# Altium PCB BCM_ECU_revA_V3.PcbDoc (part 4 of 7)
Units mm, origin at the board's own origin, x right, y up, seen from the top; angles counter-clockwise.
Board outline 109.5 x 156 mm, 4 copper layers (TOP SIG, GND, PWR, BOT SIG), stack 0.603 mm thick; 580 components, 446 nets, 1965 pads, 870 vias.
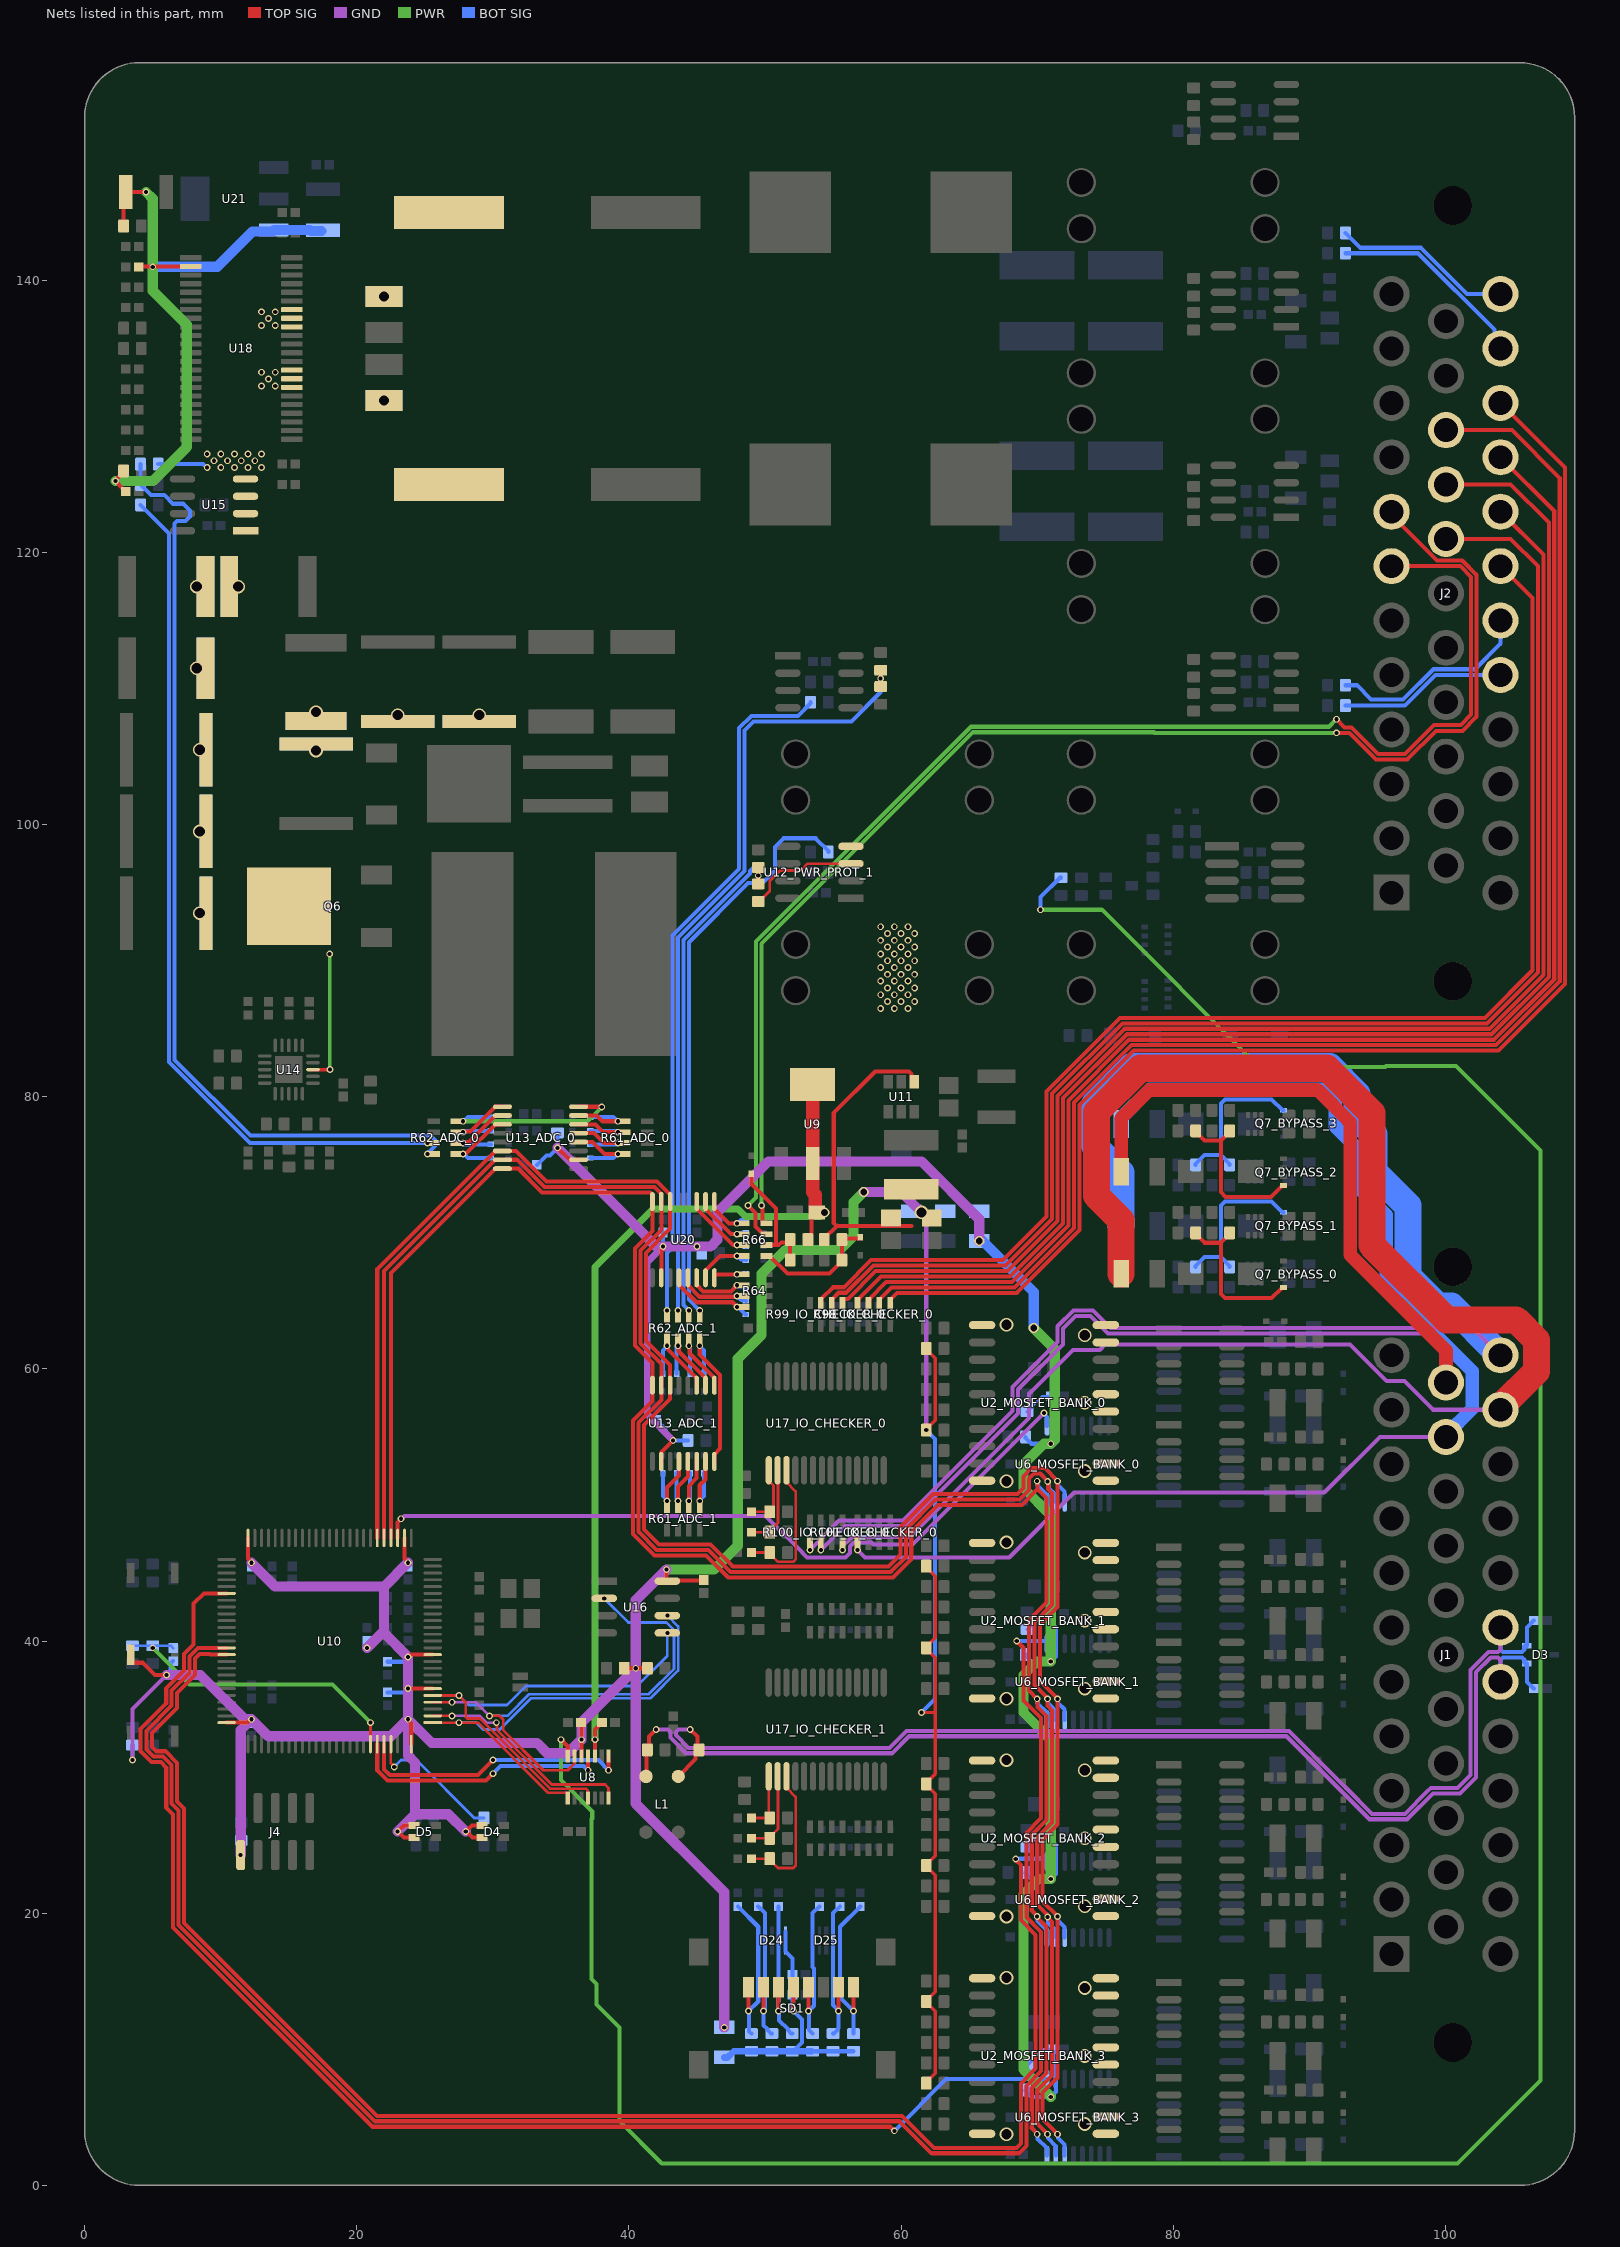
[diagram p5: the nets of this part, all layers, seen from the top]

## Via types
v1: diameter 0.5, hole 0.3, TOP SIG to BOT SIG, tented both sides, 797 vias
v2: diameter 1, hole 0.75, TOP SIG to BOT SIG, tented both sides, 56 vias
v3: diameter 4, hole 2.5, TOP SIG to BOT SIG, 9 vias
v4: diameter 0.75, hole 0.5, TOP SIG to BOT SIG, tented both sides, 6 vias
v5: diameter 2, hole 1.75, TOP SIG to BOT SIG, tented both sides, 2 vias

## Nets (pads, with @x,y where several pads share a name; then routed paths per layer and width w, separated by ;. In a path a pad name is that pad's centre, name@x,y a point inside that pad or via, vN(x,y) a via of type N, cw(c..) or ccw(c..) an arc to the next point about the centre after c; other vN are vias at no path point)
3V3: C10.1 C22.2 C24.1 C25.1 C26.1 C27.1 C28.1 C29.1 C36.1 C37.1 C77.1 C119.2 C120.2 D4.2 D4.3 D5.2 D5.3 F7.1 F8.1 F9.1 F11.1 F13.1 FB1.1 J4.1 L5.2 R7_MOSFET_BANK_0.2 R7_MOSFET_BANK_1.2 R7_MOSFET_BANK_2.2 R7_MOSFET_BANK_3.2 R8_MOSFET_BANK_0.2 R8_MOSFET_BANK_1.2 R8_MOSFET_BANK_2.2 R8_MOSFET_BANK_3.2 R36.2 R38.2 R42.1 R48.1 R53.2 SW2.2 U8.5 U10.6 U10.11 U10.27 U10.50 U10.75 U10.100 U11.1 U16.8 | length 321.7
  TOP SIG w0.102: v2(61.5,71.5) 61.924,71.076 C119.2@62.25,71.076
  TOP SIG w0.25: v1(61.5,34.75) 62.5,34.75 ; R8_MOSFET_BANK_3.2@61.85,7.5 61.85,7.575 62.5,8.225 62.5,12.775 61.85,13.425 R7_MOSFET_BANK_3.2@61.85,13.5 61.85,13.575 62.5,14.225 62.5,22.775 61.85,23.425 R8_MOSFET_BANK_2.2@61.85,23.5 61.85,23.575 62.5,24.225 62.5,28.775 61.85,29.425 R7_MOSFET_BANK_2.2@61.85,29.5 61.85,29.575 62.5,30.225 62.5,34.75 ; R8_MOSFET_BANK_1.2@61.85,39.5 61.85,39.425 62.5,38.775 62.5,34.75 ; R8_MOSFET_BANK_1.2@61.85,39.575 62.5,40.225 62.5,44.775 61.85,45.425 R7_MOSFET_BANK_1.2@61.85,45.5 ; R8_MOSFET_BANK_0.2@61.85,55.575 62.5,56.225 62.5,60.775 61.85,61.425 R7_MOSFET_BANK_0.2@61.85,61.5
  TOP SIG w0.3: SW2.2@3.375,39 3.375,38.525 3.5,38.4 4.273,38.4 5.173,37.5 v1(6,37.5) ; U10.75@10.425,34 11.946,34 12.196,34.25 v1(12.25,34.25) ; U10.50@12,47.575 12,46.054 12.25,45.804 v1(12.25,45.75) ; U10.27@23.5,47.575 23.5,46.054 23.75,45.804 v1(23.75,45.75) ; v1(23.75,34.25) 23.75,34.196 24,33.946 U10.100@24,32.425 ; v1(23.75,36.5) U10.6@25.576,36.5 ; v1(23.75,38.836) 23.804,38.836 23.968,39 U10.11@25.576,39 ; D5.3@24.2,25.55 23.45,25.55 v1(23,26) 23.45,26.45 D5.2@24.2,26.45 ; D4.3@29.2,25.55 28.504,25.55 28.054,26 v1(28,26) 28.45,26.45 D4.2@29.2,26.45 ; C10.1@36.479,34 36.497,33.981 36.497,31.545 U8.5@36.5,31.543 ; R53.2@39.65,38 v1(40.5,38) R36.2@41.25,38 ; v1(42.75,45.25) 42.75,44.471 U16.8@42.816,44.405 42.853,44.442 45.463,44.442 C77.1@45.5,44.479 ; R48.1@54.35,69.5 54.35,69.575 55.275,70.5 ; 60.75,70.5 55.275,70.5 ; U11.1@60.95,81.099 60.75,81.3 60.75,81.675 60.574,81.851 58.101,81.851 55.048,78.798 55.048,70.727 55.275,70.5
  GND w0.3: v1(3.5,31.25) 3.5,35 v1(6,37.5) ; v2(61.5,71.5) 61.5,71.311 61.85,70.961 v1(61.85,55.5)
  GND w0.75: v1(6,37.5) 8.5,37.5 11.75,34.25 v1(12.25,34.25) ; v1(11.46,24.27) 11.46,33.46 v1(12.25,34.25) ; v1(12.25,45.75) 14,44 22,44 ; v1(20.75,39.5) 22,40.75 ; v1(23,26) 24.275,27.275 ; v1(23.75,45.75) 22,44 ; v1(28,26) 26.725,27.275 24.275,27.275 ; v1(42.75,45.25) 40.5,43 v1(40.5,38) ; v1(47,11.6) 47,21.55 40.5,28.05 v1(40.5,38) ; v4(57.25,73) 60,73 v2(61.5,71.5) ; v1(12.25,34.25) 13.5,33 22.5,33 v1(23.75,34.25) ; 22,40.75 22,44 ; 22,40.75 22,40.586 v1(23.75,38.836) v1(23.75,36.5) v1(23.75,34.25) ; v1(23.75,34.25) 25.5,32.5 33.25,32.5 34,31.75 35.5,31.75 v1(36.5,32.75) 36.5,34 v1(40.5,38) ; v1(23.75,34.25) 23.75,31.596 24.275,31.071 24.275,27.275
  PWR w0.75: v1(42.75,45.25) 46.25,45.25 48,47 48,60.75 49.75,62.5 49.75,67 51.5,68.75 55.5,68.75 56.5,69.75 56.5,72.25 v4(57.25,73)
  BOT SIG w0.3: v1(3.5,31.25) R42.1@3.5,32.35 ; v1(6,37.5) 6,37.554 6.314,37.868 6.314,38.335 C22.2@6.5,38.521 ; v1(11.46,24.27) 11.48,24.29 11.48,25.33 R38.2@11.5,25.35 ; C36.1@22.25,36.229 C37.1@23.75,36.229 ; C24.1@22.25,38.479 C25.1@23.75,38.479 ; v1(61.5,34.75) 62.5,35.75 62.5,54.85 v1(61.85,55.5)
3V3_V_SENSE: D46.1 R48.2 R51.1 R66.1 | length 9.5
  TOP SIG w0.3: R66.1@50.1,68.3 50.338,68.3 51.638,67 54.725,67 55.65,67.925 R51.1@55.65,68 R48.2@55.65,69.5 55.73,69.58 56.95,69.58 57,69.63 D46.1@57,69.66
5V: C9.1 C15.1 R125.1 U8.3 U9.2 U9.4 | length 68.4
  TOP SIG w0.3: U8.3@37.5,31.543 37.5,33.5 38,34 C9.1@38.021,34 ; R125.1@53.15,69.5 53.4,69.75 53.4,71.144 53.756,71.5 C15.1@53.802,71.5
  TOP SIG w1: U9.4@53.5,80.9 53.5,73 53.698,72.802 53.698,71.506 53.704,71.5 C15.1@53.802,71.5
  PWR w0.5: v1(37.5,32.75) 37.5,67.5 41.75,71.75 48,71.75 48.55,71.2 54.065,71.2 v4(54.365,71.5) v4@54.5,71.5
5V_V_SENSE: D47.1 R66.2 R125.2 R126.1 | length 9.3
  TOP SIG w0.3: D47.1@49,74.34 49,73.6 50.802,71.798 50.802,69.237 50.665,69.1 ; R66.2@50.1,69.1 R66.2@50.163,69.163 ; R66.2@50.33,69.1 50.665,69.1 ; R126.1@51.85,68 R125.2@51.85,69.5 51.649,69.299 51.199,69.299 51,69.1 50.802,69.1 50.665,69.1
A0_IO_CHECKER_0: R95_IO_CHECKER_0.1 R102_IO_CHECKER_0.2 U17_IO_CHECKER_0.15 | length 4.7
  TOP SIG w0.2: R102_IO_CHECKER_0.2@49,49.5 50.275,49.5 R95_IO_CHECKER_0.1@50.35,49.5 50.625,49.775 50.625,51.422 50.275,51.772 U17_IO_CHECKER_0.15@50.275,52.55
A0_IO_CHECKER_1: R95_IO_CHECKER_1.1 R102_IO_CHECKER_1.2 U17_IO_CHECKER_1.15 | length 4.4
  TOP SIG w0.2: R102_IO_CHECKER_1.2@49,27 R95_IO_CHECKER_1.1@50.35,27 50.275,27.075 U17_IO_CHECKER_1.15@50.275,30.05
A1_IO_CHECKER_0: R96_IO_CHECKER_0.1 R103_IO_CHECKER_0.2 U17_IO_CHECKER_0.16 | length 6.2
  TOP SIG w0.2: R103_IO_CHECKER_0.2@49,48 R96_IO_CHECKER_0.1@50.35,48 50.35,48.075 50.952,48.677 50.952,52.523 U17_IO_CHECKER_0.16@50.925,52.55
A1_IO_CHECKER_1: R96_IO_CHECKER_1.1 R103_IO_CHECKER_1.2 U17_IO_CHECKER_1.16 | length 6.2
  TOP SIG w0.2: R103_IO_CHECKER_1.2@49,25.5 R96_IO_CHECKER_1.1@50.35,25.5 50.35,25.575 50.952,26.177 50.952,30.024 U17_IO_CHECKER_1.16@50.925,30.05
A2_IO_CHECKER_0: R97_IO_CHECKER_0.1 R104_IO_CHECKER_0.2 U17_IO_CHECKER_0.17 | length 10.5
  TOP SIG w0.2: R104_IO_CHECKER_0.2@49,46.5 R97_IO_CHECKER_0.1@50.35,46.5 50.35,46.425 50.952,45.823 52.075,45.823 52.252,46 52.252,50.998 51.575,51.675 U17_IO_CHECKER_0.17@51.575,52.55
A2_IO_CHECKER_1: R97_IO_CHECKER_1.1 R104_IO_CHECKER_1.2 U17_IO_CHECKER_1.17 | length 10.5
  TOP SIG w0.2: R104_IO_CHECKER_1.2@49,24 R97_IO_CHECKER_1.1@50.35,24 50.35,23.925 50.952,23.324 52.075,23.324 52.252,23.5 52.252,28.549 51.575,29.225 U17_IO_CHECKER_1.17@51.575,30.05
ADC_3V3: C5_MOSFET_BANK_0.1 C5_MOSFET_BANK_1.1 C5_MOSFET_BANK_2.1 C5_MOSFET_BANK_3.1 C49_ADC_0.1 C49_ADC_1.1 C114.1 F13.2 R12_MOSFET_BANK_0.1 R12_MOSFET_BANK_1.1 R12_MOSFET_BANK_2.1 R12_MOSFET_BANK_3.1 R16_MOSFET_BANK_0.1 R16_MOSFET_BANK_1.1 R16_MOSFET_BANK_2.1 R16_MOSFET_BANK_3.1 R60_ADC_0.1 R60_ADC_1.1 R65.1 U6_MOSFET_BANK_0.2 U6_MOSFET_BANK_1.2 U6_MOSFET_BANK_2.2 U6_MOSFET_BANK_3.2 U13_ADC_0.2 U13_ADC_1.2 U20.2 | length 174.2
  TOP SIG w0.3: v1(34.75,76.25) 35.615,75.385 36.29,75.385 U13_ADC_0.2@36.3,75.375 ; U13_ADC_1.2@42.375,53.2 42.385,53.21 42.385,53.885 v1(43.25,54.75) ; U20.2@42.375,67.2 42.375,68.821 42.5,68.946 v1(42.5,69)
  GND w0.5: v1(42.5,69) 41.35,67.85 41.35,56.65 v1(43.25,54.75)
  GND w0.75: v1(34.75,76.25) 42,69 v1(42.5,69) v1(45,69) 46,69 46.5,69.5 46.5,71.5 50.25,75.25 61.5,75.25 65.75,71 v4(65.75,69.4)
  PWR w0.75: v4(69.75,63) 71.3,61.45 71.3,54.8 v1(71,54.5) 70.5,54.5 69,53 69,51.25 71,49.25 v1(71,38.5) 70,38.5 69,37.5 69,34.75 71,32.75 v1(71,22.5) 70.1,22.5 69,21.4 69,8.5 v1(71,6.5)
  BOT SIG w0.2: R12_MOSFET_BANK_3.1@69.25,8.85 69.325,8.85 69.625,9.15 69.625,9.225 70.4,10 C5_MOSFET_BANK_3.1@71.021,10 ; R12_MOSFET_BANK_2.1@69.25,24.85 69.325,24.85 69.625,25.15 69.625,25.225 70.4,26 C5_MOSFET_BANK_2.1@71.021,26 ; R12_MOSFET_BANK_1.1@69.25,40.85 69.325,40.85 69.625,41.15 69.625,41.225 70.4,42 C5_MOSFET_BANK_1.1@71.021,42 ; R12_MOSFET_BANK_0.1@69.25,56.85 69.325,56.85 69.625,57.15 69.625,57.225 70.4,58 C5_MOSFET_BANK_0.1@71.021,58
  BOT SIG w0.3: C49_ADC_0.1@33.229,75 33.25,75 33.935,75.685 34.185,75.685 v1(34.75,76.25) R60_ADC_0.1@34.75,77.35 ; C49_ADC_1.1@42,56.271 42,56.25 42.685,55.565 42.685,55.315 v1(43.25,54.75) R60_ADC_1.1@44.35,54.75 ; v1(42.5,69) C114.1@42.5,70.021 ; R16_MOSFET_BANK_3.1@69.15,7 69.15,6.925 69.575,6.5 v1(71,6.5) 71.375,6.875 U6_MOSFET_BANK_3.2@71.375,7.8 71.375,9.008 71.169,9.214 71.169,9.852 C5_MOSFET_BANK_3.1@71.021,10 ; R16_MOSFET_BANK_2.1@69.15,23 69.15,22.925 69.575,22.5 v1(71,22.5) 71.375,22.875 U6_MOSFET_BANK_2.2@71.375,23.8 71.375,25.008 71.169,25.214 71.169,25.852 C5_MOSFET_BANK_2.1@71.021,26 ; R16_MOSFET_BANK_1.1@69.15,39 69.15,38.925 69.575,38.5 v1(71,38.5) 71.375,38.875 U6_MOSFET_BANK_1.2@71.375,39.8 71.375,41.008 71.169,41.214 71.169,41.852 C5_MOSFET_BANK_1.1@71.021,42 ; R16_MOSFET_BANK_0.1@69.15,55 69.15,54.925 69.575,54.5 v1(71,54.5) 71.375,54.875 U6_MOSFET_BANK_0.2@71.375,55.8 71.375,57.008 71.169,57.214 71.169,57.852 C5_MOSFET_BANK_0.1@71.021,58
  BOT SIG w0.75: v4(65.75,69.4) 66,69.4 69.75,65.65 v4(69.75,63)
ADC_IN0: D36.1 R64.8 U20.4 | length 6.3
  TOP SIG w0.3: U20.4@43.675,66.7 43.675,66.175 44.95,64.9 47.6,64.9 v1(47.95,64.55)
  BOT SIG w0.3: v1(47.95,64.55) 48,64.55 48.55,64 D36.1@48.59,64
ADC_IN0_ADC_0: D29_ADC_0.1 R61_ADC_0.8 U13_ADC_0.4 | length 5.4
  TOP SIG w0.3: U13_ADC_0.4@36.3,76.675 37.325,76.675 38.2,75.8 v1(39.2,75.8)
  BOT SIG w0.3: D29_ADC_0.1@37.16,75.5 38.846,75.5 39.146,75.8 v1(39.2,75.8)
ADC_IN0_ADC_1: D29_ADC_1.1 R61_ADC_1.8 U13_ADC_1.4 | length 5.4
  TOP SIG w0.3: v1(42.8,50.3) 42.8,51.3 43.675,52.175 U13_ADC_1.4@43.675,53.2
  BOT SIG w0.3: D29_ADC_1.1@42.5,52.34 42.5,50.654 42.8,50.354 v1(42.8,50.3)
ADC_IN1: D35.1 R64.7 U20.5 | length 5.8
  TOP SIG w0.3: U20.5@44.325,66.7 44.325,66.175 45.198,65.302 48.352,65.302 R64.7@48.4,65.35
  BOT SIG w0.3: v1(47.95,65.35) 48.25,65.05 48.54,65.05 D35.1@48.59,65
ADC_IN1_ADC_0: D28_ADC_0.1 R61_ADC_0.7 U13_ADC_0.5 | length 5.3
  TOP SIG w0.3: U13_ADC_0.5@36.3,77.325 37.425,77.325 38.15,76.6 v1(39.2,76.6)
  BOT SIG w0.3: D28_ADC_0.1@37.16,76.5 39.046,76.5 39.146,76.6 v1(39.2,76.6)
ADC_IN1_ADC_1: D28_ADC_1.1 R61_ADC_1.7 U13_ADC_1.5 | length 5.3
  TOP SIG w0.3: v1(43.6,50.3) 43.6,51.35 44.325,52.075 U13_ADC_1.5@44.325,53.2
  BOT SIG w0.3: D28_ADC_1.1@43.5,52.34 43.5,50.454 43.6,50.354 v1(43.6,50.3)
ADC_IN2: D34.1 R64.6 U20.6 | length 4.9
  TOP SIG w0.3: U20.6@44.975,66.7 44.991,66.684 44.991,66.159 45.447,65.703 47.503,65.703 v1(47.95,66.15) ; R64.6@48.1,66.087 48.337,66.087 R64.6@48.4,66.15
  BOT SIG w0.3: v1(47.95,66.15) 48.004,66.15 48.104,66.05 48.54,66.05 D34.1@48.59,66
ADC_IN2_ADC_0: D27_ADC_0.1 R61_ADC_0.6 U13_ADC_0.6 | length 5.2
  TOP SIG w0.3: U13_ADC_0.6@36.3,77.975 37.525,77.975 38.1,77.4 v1(39.2,77.4)
  BOT SIG w0.3: D27_ADC_0.1@37.16,77.5 39.046,77.5 39.146,77.4 v1(39.2,77.4)
ADC_IN2_ADC_1: D27_ADC_1.1 R61_ADC_1.6 U13_ADC_1.6 | length 5.2
  TOP SIG w0.3: v1(44.4,50.3) 44.4,51.4 44.975,51.975 U13_ADC_1.6@44.975,53.2
  BOT SIG w0.3: v1(44.4,50.3) 44.4,50.354 44.5,50.454 D27_ADC_1.1@44.5,52.34
ADC_IN3: D8.1 R64.5 U20.8 | length 3
  TOP SIG w0.3: U20.8@46.275,66.7 46.275,66.927 46.298,66.95 v1(47.95,66.95) R64.5@48.4,66.95
  BOT SIG w0.3: v1(47.95,66.95) 47.975,66.975 48.565,66.975 D8.1@48.59,67
ADC_IN3_ADC_0: D26_ADC_0.1 R61_ADC_0.5 U13_ADC_0.7 | length 5.2
  TOP SIG w0.3: U13_ADC_0.7@36.3,78.625 37.625,78.625 38.05,78.2 v1(39.2,78.2)
  BOT SIG w0.3: D26_ADC_0.1@37.16,78.5 38.846,78.5 39.146,78.2 v1(39.2,78.2)
ADC_IN3_ADC_1: D26_ADC_1.1 R61_ADC_1.5 U13_ADC_1.7 | length 5.2
  TOP SIG w0.3: v1(45.2,50.3) 45.2,51.45 45.625,51.875 U13_ADC_1.7@45.625,53.2
  BOT SIG w0.3: v1(45.2,50.3) 45.2,50.354 45.5,50.654 D26_ADC_1.1@45.5,52.34
ADC_IN4: D40.1 R66.8 U20.7 | length 4.5
  TOP SIG w0.3: U20.7@45.625,66.7 45.625,67.225 46.7,68.3 v1(47.95,68.3) R66.8@48.4,68.3
  BOT SIG w0.3: v1(47.95,68.3) 47.976,68.3 48.226,68.05 48.54,68.05 D40.1@48.59,68
ADC_IN4_ADC_0: D33_ADC_0.1 R62_ADC_0.8 U13_ADC_0.8 | length 14.5
  TOP SIG w0.3: U13_ADC_0.8@36.3,79.275 36.31,79.265 37.985,79.265 v1(38,79.25)
  PWR w0.3: v1(27.8,78.2) 36.95,78.2 v1(38,79.25)
  BOT SIG w0.3: v1(27.8,78.2) 27.854,78.2 28.154,78.5 D33_ADC_0.1@29.84,78.5
ADC_IN4_ADC_1: D33_ADC_1.1 R62_ADC_1.8 U13_ADC_1.8 | length 11.5
  TOP SIG w0.3: v1(45.2,61.7) 45.2,61.05 46.7,59.55 46.7,59.503 46.702,59.502 46.702,54.152 46.275,53.725 U13_ADC_1.8@46.275,53.2
  BOT SIG w0.3: v1(45.2,61.7) 45.2,61.646 45.5,61.346 D33_ADC_1.1@45.5,59.66
ADC_IN5: D39.1 R66.7 U20.11 | length 5.7
  TOP SIG w0.3: U20.11@44.975,72.3 44.991,72.284 44.991,71.759 47.636,69.114 48.386,69.114 R66.7@48.4,69.1
  BOT SIG w0.3: v1(47.95,69.1) 48.004,69.1 48.054,69.05 48.54,69.05 D39.1@48.59,69
ADC_IN5_ADC_0: D32_ADC_0.1 R62_ADC_0.7 U13_ADC_0.9 | length 5.8
  TOP SIG w0.3: v1(27.8,77.4) 27.85,77.45 28.35,77.45 30.175,79.275 U13_ADC_0.9@30.7,79.275
  BOT SIG w0.3: v1(27.8,77.4) 27.854,77.4 27.954,77.5 D32_ADC_0.1@29.84,77.5
ADC_IN5_ADC_1: D32_ADC_1.1 R62_ADC_1.7 U13_ADC_1.9 | length 5.8
  TOP SIG w0.3: v1(44.4,61.7) 44.45,61.65 44.45,61.15 46.275,59.325 U13_ADC_1.9@46.275,58.8
  BOT SIG w0.3: v1(44.4,61.7) 44.4,61.646 44.5,61.546 D32_ADC_1.1@44.5,59.66
ADC_IN6: D38.1 R66.6 U20.10 | length 4.8
  TOP SIG w0.3: U20.10@45.625,72.3 45.625,71.761 47.486,69.9 v1(47.95,69.9) R66.6@48.4,69.9
  BOT SIG w0.3: v1(47.95,69.9) 48.004,69.9 48.054,69.95 48.54,69.95 D38.1@48.59,70
ADC_IN6_ADC_0: D31_ADC_0.1 R62_ADC_0.6 U13_ADC_0.10 | length 5.8
  TOP SIG w0.3: v1(27.8,76.6) 27.857,76.657 28.207,76.657 30.175,78.625 U13_ADC_0.10@30.7,78.625
  BOT SIG w0.3: v1(27.8,76.6) 27.854,76.6 27.954,76.5 D31_ADC_0.1@29.84,76.5
ADC_IN6_ADC_1: D31_ADC_1.1 R62_ADC_1.6 U13_ADC_1.10 | length 5.8
  TOP SIG w0.3: v1(43.6,61.7) 43.657,61.643 43.657,61.293 45.625,59.325 U13_ADC_1.10@45.625,58.8
  BOT SIG w0.3: D31_ADC_1.1@43.5,59.66 43.5,61.546 43.6,61.646 v1(43.6,61.7)
ADC_IN7: D37.1 R66.5 U20.9 | length 3.9
  TOP SIG w0.3: U20.9@46.275,72.3 46.291,72.284 46.291,71.759 47.35,70.7 v1(47.95,70.7) R66.5@48.4,70.7
  BOT SIG w0.3: v1(47.95,70.7) 47.976,70.7 48.226,70.95 48.54,70.95 D37.1@48.59,71
ADC_IN7_ADC_0: D30_ADC_0.1 R62_ADC_0.5 U13_ADC_0.11 | length 6
  TOP SIG w0.3: v1(27.8,75.8) 27.857,75.857 28.057,75.857 30.175,77.975 U13_ADC_0.11@30.7,77.975
  BOT SIG w0.3: v1(27.8,75.8) 27.854,75.8 28.154,75.5 D30_ADC_0.1@29.84,75.5
ADC_IN7_ADC_1: D30_ADC_1.1 R62_ADC_1.5 U13_ADC_1.11 | length 6
  TOP SIG w0.3: v1(42.8,61.7) 42.857,61.643 42.857,61.443 44.975,59.325 U13_ADC_1.11@44.975,58.8
  BOT SIG w0.3: D30_ADC_1.1@42.5,59.66 42.5,61.346 42.8,61.646 v1(42.8,61.7)
ADC_MISO_MOSFET_BANK_0: U6_MOSFET_BANK_0.15 U6_MOSFET_BANK_1.15 U6_MOSFET_BANK_2.15 U6_MOSFET_BANK_3.15 U10.30 U13_ADC_0.15 U13_ADC_1.15 U20.15 | length 164.9
  TOP SIG w0.3: U10.30@22,47.575 22,67.2 30.159,75.359 30.684,75.359 U13_ADC_0.15@30.7,75.375 31.779,75.375 33.778,73.377 41.873,73.377 U20.15@42.365,72.885 ; U20.15@42.375,72.3 42.375,70.221 40.848,68.694 40.848,61.884 42.375,60.357 U13_ADC_1.15@42.375,58.8 42.375,57.721 40.698,56.044 40.698,48.034 42.034,46.698 45.834,46.698 47.462,45.07 59.238,45.07 60.347,46.179 60.347,48.215 62.53,50.398 68.707,50.398 69.402,51.093 69.402,51.929 69.772,52.3 70.228,52.3 70.775,51.753 v1(70.775,51.726) ; v1(70.75,3.75) 70.75,3.778 70.005,4.523 70.005,6.976 71.098,8.07 71.098,19.348 70.75,19.696 v1@70.75,19.726 ; v1@70.762,51.713 70.813,51.663 70.813,51.161 71.098,50.876 71.098,42.666 69.798,41.366 69.798,36.755 70.75,35.803 70.75,35.25 71.098,34.902 71.098,26.666 70.005,25.573 70.005,20.648 70.736,19.917 70.736,19.764 v1(70.775,19.726)
  BOT SIG w0.3: v1(70.75,3.75) 70.788,3.712 70.788,3.462 71.365,2.885 71.365,2.21 U6_MOSFET_BANK_3.15@71.375,2.2 ; v1(70.75,35.75) 70.788,35.712 70.788,35.462 71.365,34.885 71.365,34.21 U6_MOSFET_BANK_1.15@71.375,34.2 ; v1(70.775,19.726) 70.813,19.687 70.813,19.287 71.375,18.725 U6_MOSFET_BANK_2.15@71.375,18.2 ; v1(70.775,51.726) 70.813,51.687 70.813,51.287 71.375,50.725 U6_MOSFET_BANK_0.15@71.375,50.2
ADC_MOSI_MOSFET_BANK_0: U6_MOSFET_BANK_0.14 U6_MOSFET_BANK_1.14 U6_MOSFET_BANK_2.14 U6_MOSFET_BANK_3.14 U10.31 U13_ADC_0.14 U13_ADC_1.14 U20.14 | length 167.7
  TOP SIG w0.3: U10.31@21.5,47.575 21.5,67.35 30.175,76.025 U13_ADC_0.14@30.7,76.025 31.697,76.025 33.944,73.778 42.072,73.778 43.025,72.825 U20.14@43.025,72.3 43.025,70.303 41.25,68.528 41.25,62.05 43.025,60.275 U13_ADC_1.14@43.025,58.8 43.025,57.803 41.1,55.878 41.1,48.2 42.2,47.1 46,47.1 47.628,45.472 59.072,45.472 59.945,46.345 59.945,48.381 62.364,50.8 68.541,50.8 69,51.259 69,52.1 69.602,52.702 70.576,52.702 71.5,51.778 v1(71.5,51.75) 71.5,42.5 70.2,41.2 70.2,37.078 71.5,35.778 v1(71.5,35.75) 71.5,26.5 70.406,25.406 70.406,20.872 v1@71.5,19.778 ; v1(71.5,3.75) 71.5,3.778 70.406,4.872 70.406,6.81 71.5,7.903 v1(71.5,19.75)
  BOT SIG w0.3: v1(71.5,3.75) 71.538,3.712 71.538,3.462 72.015,2.985 72.015,2.21 U6_MOSFET_BANK_3.14@72.025,2.2 ; v1(71.5,19.75) 71.538,19.712 71.538,19.462 72.015,18.985 72.015,18.21 U6_MOSFET_BANK_2.14@72.025,18.2 ; v1(71.5,35.75) 71.538,35.712 71.538,35.462 72.015,34.985 72.015,34.21 U6_MOSFET_BANK_1.14@72.025,34.2 ; v1(71.5,51.75) 71.538,51.712 71.538,51.462 72.015,50.985 72.015,50.21 U6_MOSFET_BANK_0.14@72.025,50.2
ADC_nCS_MOSFET_BANK_0: U6_MOSFET_BANK_0.1 U10.28 | length 56
  TOP SIG w0.3: U10.28@23,47.575 23,48.703 23.239,48.942 v1(23.239,48.987)
  GND w0.3: v1(23.239,48.987) 23.293,48.987 23.506,49.2 50.05,49.2 52.75,46.5 52.75,46.472 53.072,46.15 55.928,46.15 56.25,46.472 56.25,46.95 56.539,47.239 57.839,47.239 57.976,47.102 60.852,47.102 v1(70.5,56.75)
  BOT SIG w0.3: v1(70.5,56.75) 70.5,56.696 70.715,56.48 70.715,55.81 U6_MOSFET_BANK_0.1@70.725,55.8
ADC_nCS_MOSFET_BANK_1: U6_MOSFET_BANK_1.1 U10.64 | length 136.5
  TOP SIG w0.3: U10.64@10.425,39.5 8.325,39.5 7.698,38.873 7.698,37.666 6.389,36.357 6.389,35.257 4.527,33.395 4.527,32.041 5.07,31.498 5.761,31.498 6.389,30.871 6.389,28.046 6.902,27.533 6.902,19.123 21.323,4.702 59.898,4.702 62.25,2.35 68.65,2.35 69.202,2.902 69.202,7.309 70.295,8.402 70.295,18.605 69.202,19.698 69.202,25.905 70.295,26.999 70.295,34.337 68.995,35.637 68.995,39.505 v1(68.5,40)
  BOT SIG w0.3: v1(68.5,40) 70.702,40 70.725,39.977 U6_MOSFET_BANK_1.1@70.725,39.8
ADC_nCS_MOSFET_BANK_2: U6_MOSFET_BANK_2.1 U10.65 | length 117.5
  TOP SIG w0.3: U10.65@10.425,39 9.235,39 9.185,39.05 8.45,39.05 8.1,38.7 8.1,37.5 6.79,36.19 6.79,35.09 4.928,33.228 4.928,32.208 5.236,31.9 5.927,31.9 6.79,31.037 6.79,28.212 7.303,27.7 7.303,19.289 21.489,5.103 60.065,5.103 62.416,2.752 68.484,2.752 68.8,3.068 68.8,7.475 69.894,8.569 69.894,18.406 68.8,19.5 68.8,23.551 68.427,23.925 v1(68.427,23.979)
  BOT SIG w0.3: v1(68.427,23.979) 68.448,24 70.702,24 70.725,23.977 U6_MOSFET_BANK_2.1@70.725,23.8
ADC_nCS_MOSFET_BANK_3: U6_MOSFET_BANK_3.1 U10.56 | length 101.5
  TOP SIG w0.3: U10.56@10.425,43.5 8.75,43.5 8,42.75 8,39.743 7.297,39.04 7.297,37.833 5.987,36.523 5.987,35.423 4.1,33.536 4.1,31.9 4.903,31.097 5.595,31.097 5.987,30.704 5.987,27.763 6.5,27.25 6.5,18.956 21.156,4.3 59.2,4.3 v1(59.5,4)
  BOT SIG w0.3: v1(59.5,4) 63.3,7.8 U6_MOSFET_BANK_3.1@70.725,7.8
ADC_SCLK_MOSFET_BANK_0: U6_MOSFET_BANK_0.16 U6_MOSFET_BANK_1.16 U6_MOSFET_BANK_2.16 U6_MOSFET_BANK_3.16 U10.29 U13_ADC_0.16 U13_ADC_1.16 U20.16 | length 162.5
  TOP SIG w0.3: U10.29@22.5,47.575 22.5,67.05 30.175,74.725 31.861,74.725 33.611,72.975 41.561,72.975 41.725,72.811 41.725,70.139 40.447,68.861 40.447,61.717 41.725,60.439 U13_ADC_1.16@41.725,58.8 41.725,57.639 40.297,56.211 40.297,47.867 41.867,46.297 45.667,46.297 47.296,44.669 59.404,44.669 60.748,46.013 60.748,48.048 62.697,49.997 68.873,49.997 70.038,51.162 ; v1(70,3.75) 70,3.804 69.603,4.201 69.603,7.142 70.697,8.236 70.697,18.999 70,19.696 70,19.804 69.603,20.201 69.603,25.739 70.697,26.833 70.697,34.503 70.038,35.162 70.038,35.712 69.397,36.353 69.397,41.533 70.697,42.833 70.697,50.503 70.038,51.162 ; v1(70,51.75) 70.038,51.712 70.038,51.162
  BOT SIG w0.3: v1(70,3.75) 70.038,3.712 70.038,3.412 70.725,2.725 U6_MOSFET_BANK_3.16@70.725,2.2 ; v1(70,19.75) 70.038,19.712 70.038,19.412 70.709,18.741 70.709,18.216 U6_MOSFET_BANK_2.16@70.725,18.2 ; v1(70,35.75) 70.038,35.712 70.038,35.412 70.709,34.741 70.709,34.216 U6_MOSFET_BANK_1.16@70.725,34.2 ; v1(70,51.75) 70.038,51.712 70.038,51.412 70.709,50.741 70.709,50.216 U6_MOSFET_BANK_0.16@70.725,50.2
ADDR_PWM_0: J2.28 R9.1 | length 12.3
  BOT SIG w0.3: R9.1@92.65,108.75 97.019,108.75 99.269,111 J2.28@104,111
ADDR_PWM_1: J2.29 R10.1 | length 15.2
  BOT SIG w0.3: R10.1@92.65,110.25 93.5,110.25 94.55,109.2 96.901,109.2 99.124,111.424 102.174,111.424 104.05,113.3 J2.29@104.05,115
ADDR_PWM_2: J2.34 R70.1 | length 14.9
  BOT SIG w0.3: R70.1@92.65,142 93.582,142 93.584,141.998 98.002,141.998 103.6,136.4 103.6,135.45 J2.34@104.05,135
ADDR_PWM_3: J2.35 R71.1 | length 13.3
  BOT SIG w0.3: R71.1@92.65,143.5 93.75,142.4 98.2,142.4 101.6,139 J2.35@104.05,139
AMP_12V: C96.1 C97.2 C101.2 C118.1 R134.1 R135.1 U18.2 U21.3 | length 49.7
  TOP SIG w0.3: v1(2.25,125.25) 2.814,124.686 C101.2@3,124.5 ; v1@2.25,125.272 2.288,125.31 2.288,125.363 2.85,125.925 R135.1@2.85,126 ; R134.1@2.85,144 2.85,146.35 C96.1@3,146.5 v1(4.5,146.5) ; C97.2@3.979,141 3.995,141.016 7.764,141.016 U18.2@7.78,141.033
  PWR w0.75: v1(2.25,125.25) 5,125.25 7.5,127.75 7.5,136.75 5,139.25 v1(5,141) 5,146 v1(4.5,146.5)
  BOT SIG w0.75: v1(5,141) 9.75,141 12.355,143.605 13.805,143.605 U21.3@13.9,143.7 16.55,143.7 16.625,143.625 C118.1@17.375,143.625
AMP_I_SENSE: R62_ADC_1.4 R108.1 | length 51.1
  BOT SIG w0.3: v1(42.8,64.3) 42.8,68.522 43.197,68.919 43.197,91.857 48.098,96.759 48.098,107.098 49,108 52.425,108 53.35,108.925 R108.1@53.35,109
AMP_V_SENSE: D23.1 R62_ADC_1.3 R109.2 R110.1 | length 58
  TOP SIG w0.3: R110.1@58.5,110.15 R109.2@58.5,111.35
  BOT SIG w0.3: v1(43.6,64.3) 43.598,64.302 43.598,91.691 48.5,96.592 48.5,106.932 49.166,107.598 56.348,107.598 58.467,109.717 58.467,110.127 D23.1@58.5,110.16 v1(58.5,110.75)
AMP_VCC: C88.1 C89.1 C90.1 C92.1 C93.1 C94.1 R105.1 U15.3 U15.4 U18.29 U18.30 U18.31 U18.36 U18.37 U18.38 | length 3.7
  BOT SIG w0.3: R105.1@5.4,126.5 8.696,126.5 8.946,126.25 v1(9,126.25)
  other v1: 10,126.25 11,126.25 12,126.25 13,126.25 9.5,126.75 10.5,126.75 11.5,126.75 12.5,126.75 9,127.25 10,127.25 11,127.25 12,127.25 13,127.25 13,132.25 14,132.25 13.5,132.75 13,133.25 14,133.25 13,136.695 14,136.695 13.5,137.195 13,137.695 14,137.695
  other v2: 22,131.175 22,138.826
BCM_I_SENSE: R52_PWR_PROT_1.1 R62_ADC_1.1 | length 42.3
  BOT SIG w0.3: v1(45.2,64.3) 44.402,65.098 44.402,91.358 48.744,95.7 49.8,95.7 50.732,96.632 50.732,98.37 51.363,99 53.725,99 54.65,98.075 R52_PWR_PROT_1.1@54.65,98
BCM_V_SENSE: D6_PWR_PROT_1.1 R47_PWR_PROT_1.2 R49_PWR_PROT_1.1 R62_ADC_1.2 | length 36.9
  TOP SIG w0.3: R47_PWR_PROT_1.2@49.5,95.75 v1(49.5,96.25) R49_PWR_PROT_1.1@49.5,96.85
  BOT SIG w0.3: v1(44.4,64.3) 44,64.7 44,91.524 48.902,96.426 48.902,96.592 49.15,96.84 D6_PWR_PROT_1.1@49.5,96.84 v1(49.5,96.25)
BCM_VCC: R47_PWR_PROT_1.1 U2_MOSFET_BANK_0.1 U2_MOSFET_BANK_0.10 U2_MOSFET_BANK_0.11 U2_MOSFET_BANK_0.12 U2_MOSFET_BANK_0.15 U2_MOSFET_BANK_0.16 U2_MOSFET_BANK_0.19 U2_MOSFET_BANK_0.20 U2_MOSFET_BANK_1.1 U2_MOSFET_BANK_1.10 U2_MOSFET_BANK_1.11 U2_MOSFET_BANK_1.12 U2_MOSFET_BANK_1.15 U2_MOSFET_BANK_1.16 U2_MOSFET_BANK_1.19 U2_MOSFET_BANK_1.20 U2_MOSFET_BANK_2.1 U2_MOSFET_BANK_2.10 U2_MOSFET_BANK_2.11 U2_MOSFET_BANK_2.12 U2_MOSFET_BANK_2.15 U2_MOSFET_BANK_2.16 U2_MOSFET_BANK_2.19 U2_MOSFET_BANK_2.20 U2_MOSFET_BANK_3.1 U2_MOSFET_BANK_3.10 U2_MOSFET_BANK_3.11 U2_MOSFET_BANK_3.12 U2_MOSFET_BANK_3.15 U2_MOSFET_BANK_3.16 U2_MOSFET_BANK_3.19 U2_MOSFET_BANK_3.20 U12_PWR_PROT_1.3 U12_PWR_PROT_1.4 | length 8.4
  TOP SIG w0.2: R47_PWR_PROT_1.1@49.5,94.35 49.575,94.35 50.349,95.124 50.349,95.864 51.12,96.635 52.635,96.635 53.135,97.135 U12_PWR_PROT_1.3@56.316,97.135
  other v1: 58.5,86.5 59.5,86.5 60.5,86.5 59,87 60,87 61,87 58.5,87.5 59.5,87.5 60.5,87.5 59,88 60,88 61,88 58.5,88.5 59.5,88.5 60.5,88.5 59,89 60,89 61,89 58.5,89.5 59.5,89.5 60.5,89.5 59,90 60,90 61,90 58.5,90.5 59.5,90.5 60.5,90.5 59,91 60,91 61,91 58.5,91.5 59.5,91.5 60.5,91.5 59,92 60,92 61,92 58.5,92.5 59.5,92.5 60.5,92.5
  other v2: 67.75,3.75 73.5,4.5 73.5,9.5 73.5,14.5 67.75,15.25 67.75,19.75 73.5,20.5 73.5,25.5 73.5,30.5 67.75,31.25 67.75,35.75 73.5,36.5 73.5,41.5 73.5,46.5 67.75,47.25 67.75,51.75 73.5,52.5 73.5,57.5 73.505,62.472 67.75,63.25
BOOT: C22.1 R39.1 R41.2 U10.94 | length 22.9
  TOP SIG w0.2: U10.94@21,32.425 v1(21,34)
  PWR w0.3: v1(5,39.5) 7.7,36.8 18.2,36.8 v1(21,34)
  BOT SIG w0.2: R41.2@3.5,39.65 R39.1@5,39.65 6.329,39.65 C22.1@6.5,39.479
BST_I_SENSE: R62_ADC_0.3 R111.1 | length 63.3
  BOT SIG w0.3: R111.1@4.1,123.5 6.2,121.4 6.2,82.55 12.148,76.602 25.198,76.602 v1(25.2,76.6)
BST_REG_OUT: C53.1 C54.1 C55.1 C56.1 C57.1 C58.1 C59.1 C60.1 C61.1 C62.1 C68.1 C69.1 C70.1 C71.1 C72.1 C73.1 C74.1 C75.1 C76.1 C102.1 Q6.4 U14.3 U15.1 U15.2 | length 9.8
  TOP SIG w0.254: U14.3@16.775,82 16.776,82.001 18.029,82.001 v1(18.03,82.002)
  PWR w0.254: v1(18,90.5) 18.015,90.485 18.015,82.017 v1(18.03,82.002)
  other v2: 8.448,93.5 8.448,99.5 17,105.448 8.448,105.5 23,108.052 29,108.052 17,108.275 8.225,111.5 8.225,117.5 11.275,117.5
BST_V_SENSE: R62_ADC_0.4 R105.2 R106.1 | length 70
  BOT SIG w0.3: R105.2@4.1,126.5 R106.1@4.1,125 4.873,124.227 5.846,124.227 6.487,123.585 7.242,123.585 7.734,123.093 7.734,122.637 7.412,122.315 6.777,122.315 6.602,122.139 6.602,82.716 12.168,77.15 25.428,77.15 25.75,76.828 25.75,76.372 25.2,75.822 v1(25.2,75.8)
CAN_INH: R30.1 U8.7 | length 218.3
  TOP SIG w0.3: v1(35,32.75) 35.5,32.25 U8.7@35.5,31.543
  PWR w0.3: v1(35,32.75) 35,29.778 37.3,27.478 37.3,26.959 37.252,26.911 37.252,15.148 37.6,14.8 37.6,13.3 39.302,11.598 39.302,4.708 42.409,1.6 57.25,1.6 100.891,1.6 106.998,7.708 106.998,76.042 100.792,82.248 95.635,82.248 95.587,82.2 86.3,82.2 74.75,93.75 v1(70.25,93.75)
  BOT SIG w0.3: v1(70.25,93.75) 70.25,94.675 71.675,96.1 R30.1@71.75,96.1
CAN_MISO: U8.6 U10.4 U16.2 | length 37.7
  TOP SIG w0.2: U10.4@25.576,35.5 v1(27,35.5) ; v1(29.75,34.498) 29.752,34.5 30.5,34.5 30.75,34.25 30.75,33.45 33.7,30.5 35.5,30.5 36,31 U8.6@36,31.543
  GND w0.2: v1(27,35.5) 28.75,35.5 29.75,34.5 v1(29.75,34.498)
  BOT SIG w0.2: v1(29.75,34.498) 29.752,34.5 31.075,34.5 32.67,36.095 41.452,36.095 43.316,37.959 43.316,40.802 42.753,41.365 39.954,41.365 v1(38.184,43.135)
CAN_MOSI: U8.11 U10.5 U16.5 | length 34.3
  TOP SIG w0.2: U10.5@25.576,36 v1(27.5,36) 28,35.5 28,34.419 28.117,34.302 29.045,34.302 34.199,29.148 36.83,29.148 36.948,29.03 36.948,28.509 U8.11@37,28.457
  BOT SIG w0.2: v1(27.5,36) 28.2,35.3 31.022,35.3 32.42,36.698 40.598,36.698 42.816,38.916 v1(42.816,40.595)
CAN_N: C12.1 D3.2 J1.30 L1.4 R35.2 | length 86.9
  TOP SIG w0.3: L1.4@43.625,30.05 44.9,31.325 44.9,31.75 R35.2@45.15,32 45.021,32.129 45.021,32.979 v1(44.5,33.5)
  GND w0.3: v1(44.5,33.5) 43.627,33.5 43.451,33.324 43.451,33.076 44.375,32.152 59.152,32.152 60.402,33.402 88.498,33.402 92.298,29.602 92.416,29.484 92.684,29.216 94.598,27.302 97.034,27.302 98.698,28.966 98.934,29.202 100.902,29.202 101.845,30.145 101.845,37.873 103.173,39.201 103.874,39.201 104.05,39.377 J1.30@104.05,41
  BOT SIG w0.3: J1.30@104.05,41 104.05,39.377 104.226,39.201 104.99,39.201 105.624,39.201 105.8,39.377 105.8,39.59 105.86,39.65 D3.2@106,39.65 106,41 106.5,41.5 C12.1@106.521,41.5
CAN_nCS: U8.14 U10.2 | length 16.1
  TOP SIG w0.2: U10.2@25.576,34.5 v1(27,34.5) ; v1(30.25,34) 30.307,33.943 30.307,33.466 34.324,29.449 38.251,29.449 38.5,29.2 U8.14@38.5,28.457
  GND w0.2: v1(27,34.5) 29.041,34.5 29.543,33.998 30.248,33.998 v1(30.25,34)
CAN_P: C14.2 D3.1 J1.29 L1.1 R37.1 | length 87
  TOP SIG w0.3: L1.1@41.25,30.05 41.3,30.1 41.3,31.95 R37.1@41.35,32 41.479,32.129 41.479,32.979 v1(42,33.5)
  GND w0.3: v1(42,33.5) 42.873,33.5 43.049,33.324 43.049,32.909 44.209,31.75 59.318,31.75 60.568,33 88.332,33 94.432,26.9 97.2,26.9 99.1,28.8 101.068,28.8 102.246,29.978 102.246,37.707 103.339,38.799 103.874,38.799 104.05,38.624 J1.29@104.05,37
  BOT SIG w0.3: J1.29@104.05,37 104.05,38.624 104.226,38.799 104.824,38.799 105.624,38.799 105.8,38.623 105.8,38.41 105.86,38.35 D3.1@106,38.35 106,37 106.5,36.5 C14.2@106.521,36.5
CAN_RX: U8.4 U10.95 | length 19.3
  TOP SIG w0.3: U10.95@21.5,32.425 21.5,30.5 22.25,29.75 29.5,29.75 v1(30,30.25) ; v1(37,30.5) U8.4@37,31.543
  BOT SIG w0.3: v1(30,30.25) 30.55,30.8 36.674,30.8 36.974,30.5 v1(37,30.5)
CAN_SCLK: U8.8 U10.1 U16.6 | length 34.9
  TOP SIG w0.2: U10.1@25.576,34 v1(27.5,34) 28.9,34 34.054,28.846 35.447,28.846 35.5,28.794 U8.8@35.5,28.457
  BOT SIG w0.2: v1(27.5,34) 28.769,34 29.269,33.5 30.502,33.5 32.795,35.794 41.577,35.794 43.618,37.834 43.618,41.063 v1(42.816,41.865)
CAN_TX: U8.1 U10.96 | length 20.3
  TOP SIG w0.3: U10.96@22,32.425 22,30.568 22.416,30.152 28.902,30.152 v1(30,31.25) ; v1(38.5,30.5) U8.1@38.5,31.543
  BOT SIG w0.3: v1(30,31.25) 37.75,31.25 v1(38.5,30.5)
CONN_CLK: D25.1 D25.10 R116.1 R117.2 SD1.5 | length 11.6
  TOP SIG w0.3: v1(53.195,12.8) SD1.5@53.195,14.55
  BOT SIG w0.3: R116.1@53.5,11.15 53.483,11.15 53.233,11.4 53.233,12.762 v1(53.195,12.8) 53.588,13.193 53.588,15.94 53.5,16.028 D25.10@53.5,17.35 D25.1@53.5,18.65 53.5,20 R117.2@54,20.5
CONN_CMD: D24.4 D24.7 R118.2 R119.1 SD1.3 | length 11.6
  TOP SIG w0.3: v1(50.995,12.8) SD1.3@50.995,14.55
  BOT SIG w0.3: R118.2@51,20.5 D24.4@51,18.65 D24.7@51,17.35 50.998,17.348 50.998,12.803 v1(50.995,12.8) 51.033,12.762 51.033,12.117 51.675,11.475 51.675,11.4 51.925,11.15 R119.1@52,11.15
CONN_DAT0: D25.4 D25.7 R112.2 R120.1 SD1.7 | length 11.7
  TOP SIG w0.3: v1(55.395,12.8) SD1.7@55.395,14.55
  BOT SIG w0.3: R120.1@55,11.15 55.075,11.15 55.325,11.4 55.325,11.475 55.395,11.545 v1(55.395,12.8) 55.395,12.854 55,13.249 D25.7@55,17.35 D25.4@55,18.65 55,20 R112.2@55.5,20.5
CONN_DAT1: D25.5 D25.6 R113.2 R122.1 SD1.8 | length 12.1
  TOP SIG w0.3: v1(56.495,12.8) SD1.8@56.495,14.55
  BOT SIG w0.3: R122.1@56.5,11.15 56.498,11.152 56.498,12.798 v1(56.495,12.8) 55.5,13.795 D25.6@55.5,17.35 55.5,19 R113.2@57,20.5
CONN_DAT2: D24.1 D24.10 R114.2 R123.1 SD1.1 | length 12.1
  TOP SIG w0.3: v1(48.795,12.8) SD1.1@48.795,14.55
  BOT SIG w0.3: R114.2@48,20.5 49.5,19 D24.10@49.5,17.35 49.5,13.505 v1(48.795,12.8) 48.833,12.762 48.833,11.317 R123.1@49,11.15
CONN_DAT3: D24.2 D24.9 R115.2 R124.1 SD1.2 | length 11.6
  TOP SIG w0.3: v1(49.895,12.8) SD1.2@49.895,14.55
  BOT SIG w0.3: R115.2@49.5,20.5 50,20 D24.2@50,18.65 D24.9@50,17.35 50,12.959 49.895,12.854 v1(49.895,12.8) 49.895,11.755 50.175,11.475 50.175,11.4 50.425,11.15 R124.1@50.5,11.15
CONN_VDD: C112.1 C113.1 D24.5 D24.6 F7.2 R116.2 R119.2 R120.2 R122.2 R123.2 R124.2 SD1.4 | length 21
  TOP SIG w0.3: v1(52.095,12.8) SD1.4@52.095,14.55
  BOT SIG w0.3: D24.5@51.5,18.65 D24.6@51.5,17.35 51.5,17.175 52.021,16.654 C112.1@52.021,15.5 C113.1@52.021,14 52.021,12.928 52.095,12.854 v1(52.095,12.8) 52.727,12.169 52.727,10.502 R119.2@52.075,9.85 ; R116.2@53.425,9.85 R116.2@53.5,9.85 R120.2@55,9.85 R122.2@56.5,9.85
  BOT SIG w0.5: F7.2@47,9.4 47.25,9.4 47.7,9.85 R123.2@49,9.85 R124.2@50.5,9.85 R119.2@52,9.85 R116.2@53.425,9.85
EXT_ADC_IN_0: J2.7 R66.3 | length 100.3
  TOP SIG w0.3: v1(48.75,72) 49.294,71.456 49.294,70.468 49.863,69.9 R66.3@50.1,69.9 ; v1(92,107.75) 92.598,107.152 93.116,107.152 95.068,105.2 97.032,105.2 99.17,107.338 101.138,107.338 101.9,108.1 101.9,118.2 101.1,119 J2.7@96.05,119
  PWR w0.3: v1(48.75,72) 49.348,72.598 49.348,91.416 65.129,107.197 91.447,107.197 v1(92,107.75)
EXT_ADC_IN_1: J2.8 R66.4 | length 100.7
  TOP SIG w0.3: v1(49.75,72) 49.75,71.946 49.8,71.896 49.8,70.763 49.863,70.7 R66.4@50.1,70.7 ; v1(92,106.75) 92.95,106.75 94.902,104.798 97.198,104.798 99.3,106.9 101.268,106.9 102.302,107.934 102.302,108.454 102.302,118.366 101.244,119.424 99.397,119.424 96.05,122.77 J2.8@96.05,123
  PWR w0.3: v1(49.75,72) 49.75,91.25 65.295,106.795 78.579,106.795 78.624,106.75 v1(92,106.75)
EXT_IN_0: F6_BYPASS_0.1 J1.34 R100_IO_CHECKER_0.4 | length 124.3
  TOP SIG w2: F6_BYPASS_0.1@76.166,67 76.166,70.934 74.361,72.739 74.361,78.883 77.578,82.1 91.3,82.1 94.603,78.797 94.603,69.097 100.1,63.6 105.2,63.6 106.7,62.1 106.7,59.826 104.05,57.176 J1.34@104.05,57
  GND w0.3: v1(55.7,46.7) 55.738,46.738 55.738,47.006 56.372,47.64 60.64,47.64 69.405,56.405 69.405,58.173 72.632,61.4 74.6,61.4 75.002,61.802 92.991,61.802 95.692,59.1 97,59.1 99.1,57 J1.34@104.05,57
EXT_IN_1: F6_BYPASS_1.1 J1.35 R100_IO_CHECKER_0.1 | length 116.1
  GND w0.3: v1(53.3,46.7) 55.445,48.845 60.141,48.845 68.2,56.904 68.2,58.672 71.5,61.972 71.5,63.136 72.667,64.303 73.003,64.303 74.097,64.303 75.394,63.006 101.994,63.006 104,61 J1.35@104.05,61
  BOT SIG w2: F6_BYPASS_1.1@76.166,70.5 76.166,74.434 74.25,76.35 74.25,79.5 76.95,82.2 91.5,82.2 93.5,80.2 93.5,78.5 94.75,77.25 94.75,74.5 97.25,72 97.25,66.815 99.465,64.6 100.45,64.6 J1.35@103.926,61.125
EXT_IN_2: F6_BYPASS_2.1 J1.23 R100_IO_CHECKER_0.2 | length 102.9
  TOP SIG w1: F6_BYPASS_2.1@76.166,74.5 76.166,78.424 78.241,80.499 90.637,80.499 93.002,78.134 93.002,68.399 100.05,61.35 J1.23@100.05,59
  GND w0.3: v1(54.1,46.7) 55.843,48.443 60.308,48.443 68.602,56.737 68.602,58.505 71.902,61.805 71.902,62.97 72.834,63.902 73.916,63.902 75.213,62.605 98.895,62.605 100.05,61.45 J1.23@100.05,59
EXT_IN_3: F6_BYPASS_3.1 J1.22 R101_IO_CHECKER_0.1 | length 94.1
  GND w0.3: v1(56.8,46.689) 57.35,46.139 57.828,46.139 57.839,46.15 67.95,46.15 72.702,50.902 91.102,50.902 95.2,55 J1.22@100.05,55
  BOT SIG w1: F6_BYPASS_3.1@76.166,78 76.166,78.445 78.273,80.552 90.884,80.552 91.898,79.537 91.898,77.837 93.148,76.587 93.148,73.81 95.648,71.31 95.648,66.152 101.977,59.824 101.977,57.069 100.05,55.142 J1.22@100.05,55
EXT_INT_0: J2.19 R99_IO_CHECKER_0.2 | length 104.9
  TOP SIG w0.3: R99_IO_CHECKER_0.2@54.9,64.85 54.963,64.913 54.963,65.15 55.411,65.598 55.962,65.598 57.962,67.598 66.066,67.598 66.666,67.598 67.666,67.598 71.102,71.034 71.102,72.034 71.102,72.634 71.102,80.234 76.268,85.4 103.068,85.4 106.802,89.134 106.802,118.998 104.8,121 J2.19@100.05,121
EXT_INT_1: J2.20 R98_IO_CHECKER_0.4 | length 108.4
  TOP SIG w0.3: R98_IO_CHECKER_0.4@56.8,64.85 56.862,64.913 56.862,65.15 58.508,66.795 66.399,66.795 66.999,66.795 67.999,66.795 71.905,70.701 71.905,71.701 71.905,72.301 71.905,79.901 76.601,84.597 103.401,84.597 107.605,88.801 107.605,122.195 104.8,125 J2.20@100.05,125
EXT_INT_2: J2.21 R98_IO_CHECKER_0.2 | length 112.2
  TOP SIG w0.3: R98_IO_CHECKER_0.2@58.4,64.85 58.462,64.913 58.462,65.15 59.305,65.992 66.732,65.992 67.332,65.992 68.332,65.992 72.708,70.368 72.708,71.368 72.708,71.968 72.708,79.568 76.933,83.794 103.733,83.794 108.408,88.468 108.408,125.492 104.9,129 J2.21@100.05,129
EXT_INT_3: J2.30 R99_IO_CHECKER_0.3 | length 98.6
  TOP SIG w0.3: R99_IO_CHECKER_0.3@54.1,64.85 54.163,64.913 54.163,65.163 55,66 55.796,66 57.796,68 67.5,68 70.7,71.2 70.7,80.4 76.102,85.802 102.902,85.802 106.4,89.3 106.4,116.65 J2.30@104.05,119
EXT_INT_4: J2.31 R99_IO_CHECKER_0.1 | length 102.4
  TOP SIG w0.3: R99_IO_CHECKER_0.1@55.7,64.85 55.7,65.087 55.763,65.15 56.082,65.15 58.128,67.197 66.233,67.197 66.833,67.197 67.833,67.197 71.503,70.867 71.503,71.867 71.503,72.467 71.503,80.067 76.434,84.998 103.234,84.998 107.203,88.967 107.203,119.847 J2.31@104.05,123
EXT_INT_5: J2.32 R98_IO_CHECKER_0.3 | length 105.8
  TOP SIG w0.3: R98_IO_CHECKER_0.3@57.6,64.85 57.663,64.913 57.663,65.15 58.906,66.394 66.565,66.394 67.165,66.394 68.165,66.394 72.306,70.535 72.306,71.535 72.306,72.135 72.306,79.735 76.767,84.195 103.567,84.195 108.006,88.635 108.006,123.044 J2.32@104.05,127
EXT_INT_6: J2.33 R98_IO_CHECKER_0.1 | length 109.5
  TOP SIG w0.3: R98_IO_CHECKER_0.1@59.2,64.85 59.263,64.913 59.263,65.15 59.703,65.59 66.898,65.59 67.498,65.59 68.498,65.59 73.11,70.202 73.11,71.202 73.11,71.802 73.11,79.402 77.1,83.392 103.9,83.392 108.81,88.302 108.81,126.241 J2.33@104.05,131
G_LED: R43.1 U10.97 | length 10.3
  TOP SIG w0.2: U10.97@22.5,32.425 22.5,31.017 22.75,30.767 v1(22.75,30.75)
  BOT SIG w0.2: v1(22.75,30.75) 23.25,31.25 24.377,31.25 28.627,27 R43.1@29.35,27
GATE_BYPASS_0: Q7_BYPASS_0.4 R56_BYPASS_0.2 R57_BYPASS_0.1 | length 12
  TOP SIG w0.3: R57_BYPASS_0.1@81.65,70 81.65,69.925 82.302,69.274 83.498,69.274 83.5,69.275 ; R56_BYPASS_0.2@84.15,70 84.15,69.925 83.5,69.275 ; Q7_BYPASS_0.4@88.1,65.988 88.025,65.988 87.237,65.2 83.8,65.2 83.5,65.5 83.5,69.275
GATE_BYPASS_1: Q7_BYPASS_1.4 R56_BYPASS_1.2 R57_BYPASS_1.1 | length 12
  BOT SIG w0.3: R57_BYPASS_1.1@81.65,67.5 81.65,67.575 82.302,68.227 83.498,68.227 83.5,68.225 ; R56_BYPASS_1.2@84.15,67.5 84.15,67.575 83.5,68.225 ; Q7_BYPASS_1.4@88.1,71.513 88.025,71.513 87.238,72.3 83.8,72.3 83.5,72 83.5,68.225
GATE_BYPASS_2: Q7_BYPASS_2.4 R56_BYPASS_2.2 R57_BYPASS_2.1 | length 12.1
  TOP SIG w0.3: R57_BYPASS_2.1@81.65,77.5 81.65,77.425 82.302,76.774 83.498,76.774 83.5,76.775 ; R56_BYPASS_2.2@84.15,77.5 84.15,77.425 83.5,76.775 ; Q7_BYPASS_2.4@88.1,73.488 88.025,73.488 87.187,72.65 83.85,72.65 83.5,73 83.5,76.775
GATE_BYPASS_3: Q7_BYPASS_3.4 R56_BYPASS_3.2 R57_BYPASS_3.1 | length 12
  BOT SIG w0.3: R57_BYPASS_3.1@81.65,75 81.65,75.075 82.302,75.727 83.498,75.727 83.5,75.725 ; R56_BYPASS_3.2@84.15,75 84.15,75.075 83.5,75.725 ; Q7_BYPASS_3.4@88.1,79.013 88.025,79.013 87.238,79.8 83.8,79.8 83.5,79.5 83.5,75.725